# Altium PCB Design2.PcbDoc
Units mm, origin at the board's own origin, x right, y up, seen from the top; angles counter-clockwise.
Board outline 75 x 80 mm, 4 copper layers (Top Layer, Layer 1, Layer 2, Bottom Layer), stack 0.603 mm thick; 55 components, 25 nets, 149 pads, 260 vias.
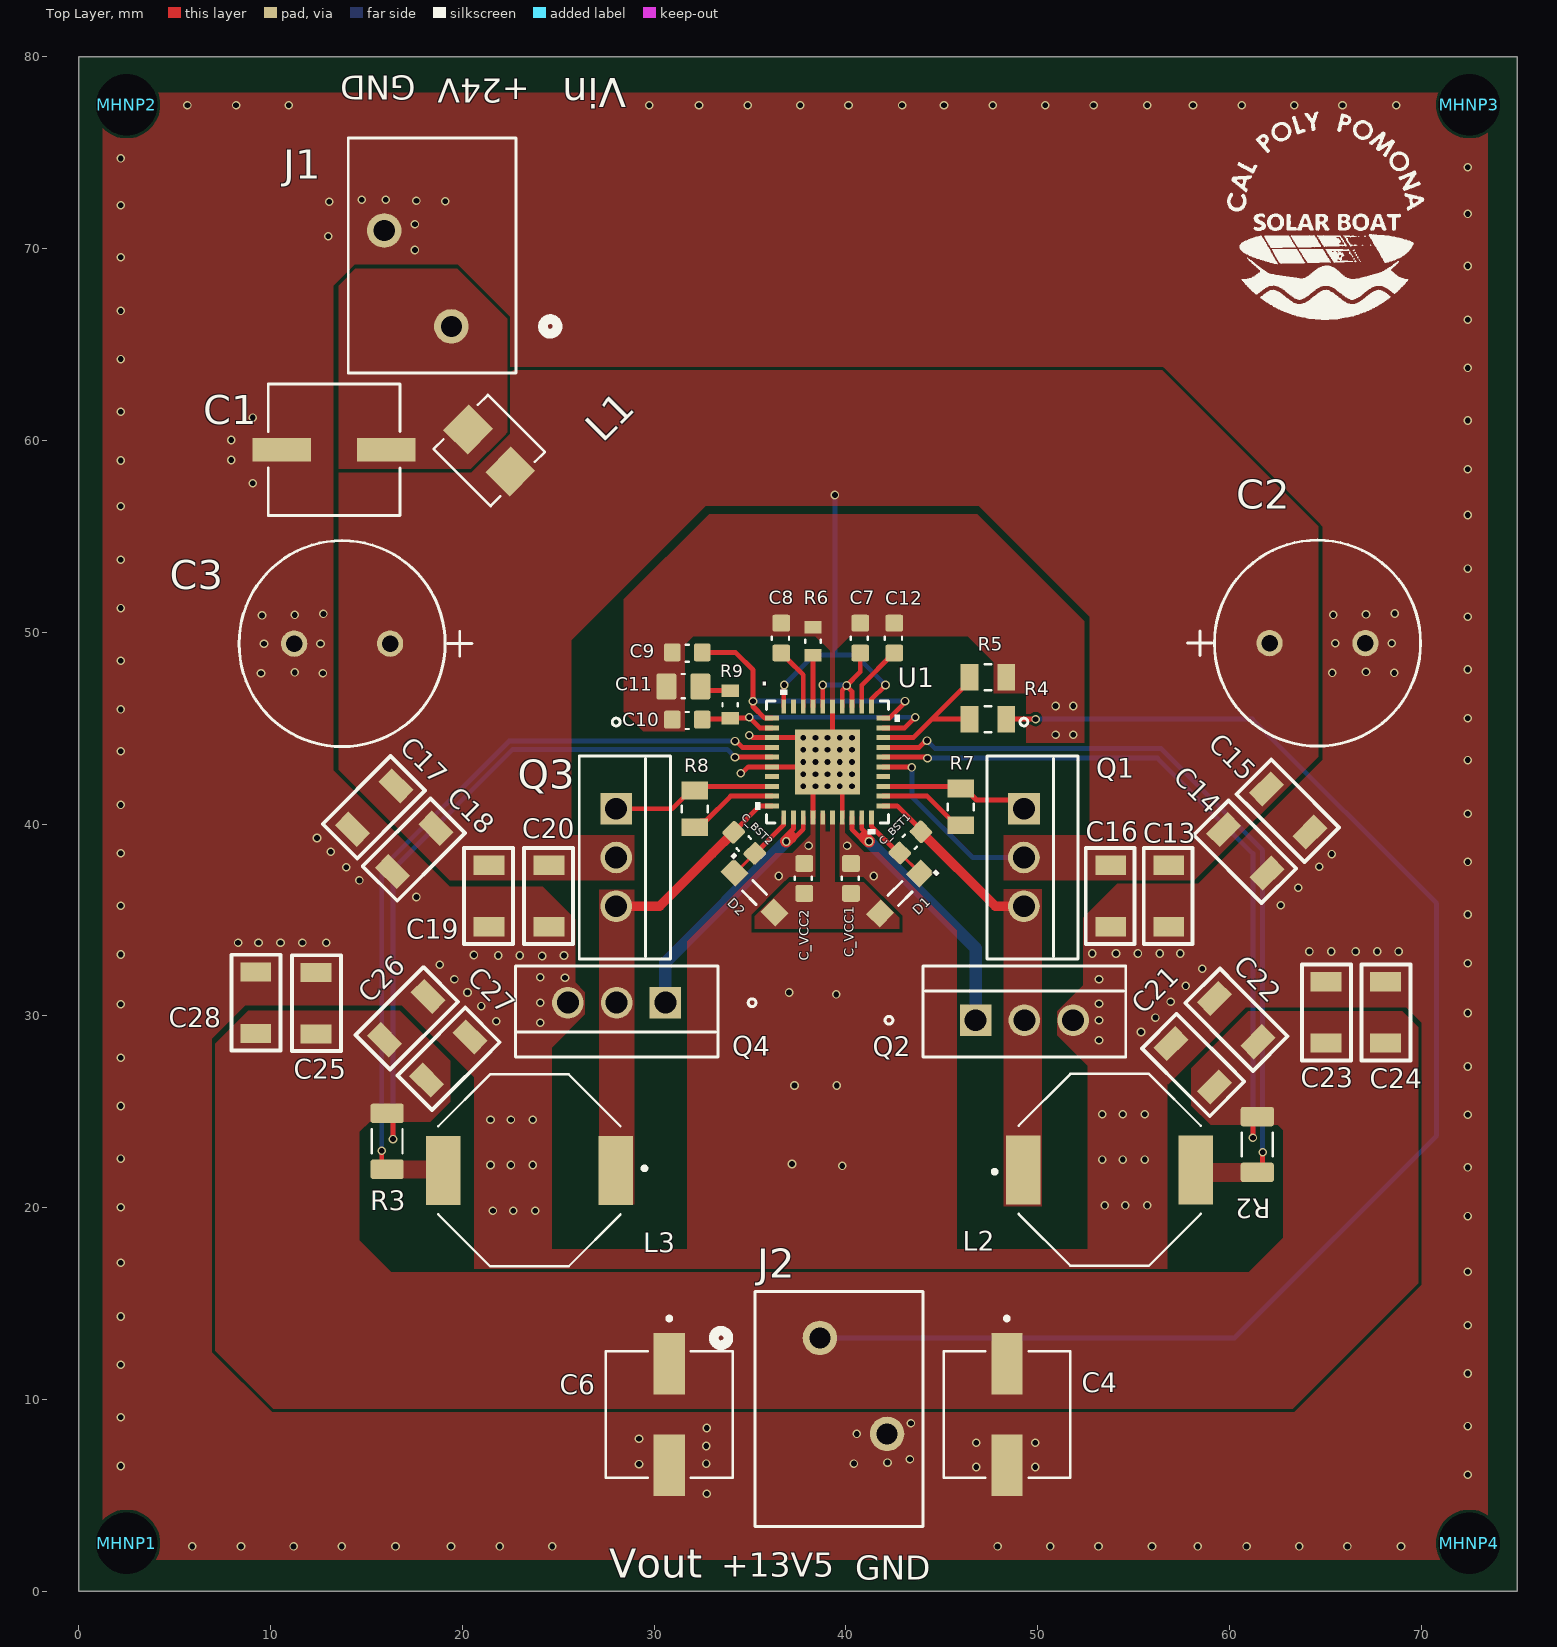
[diagram p0: Top Layer view]
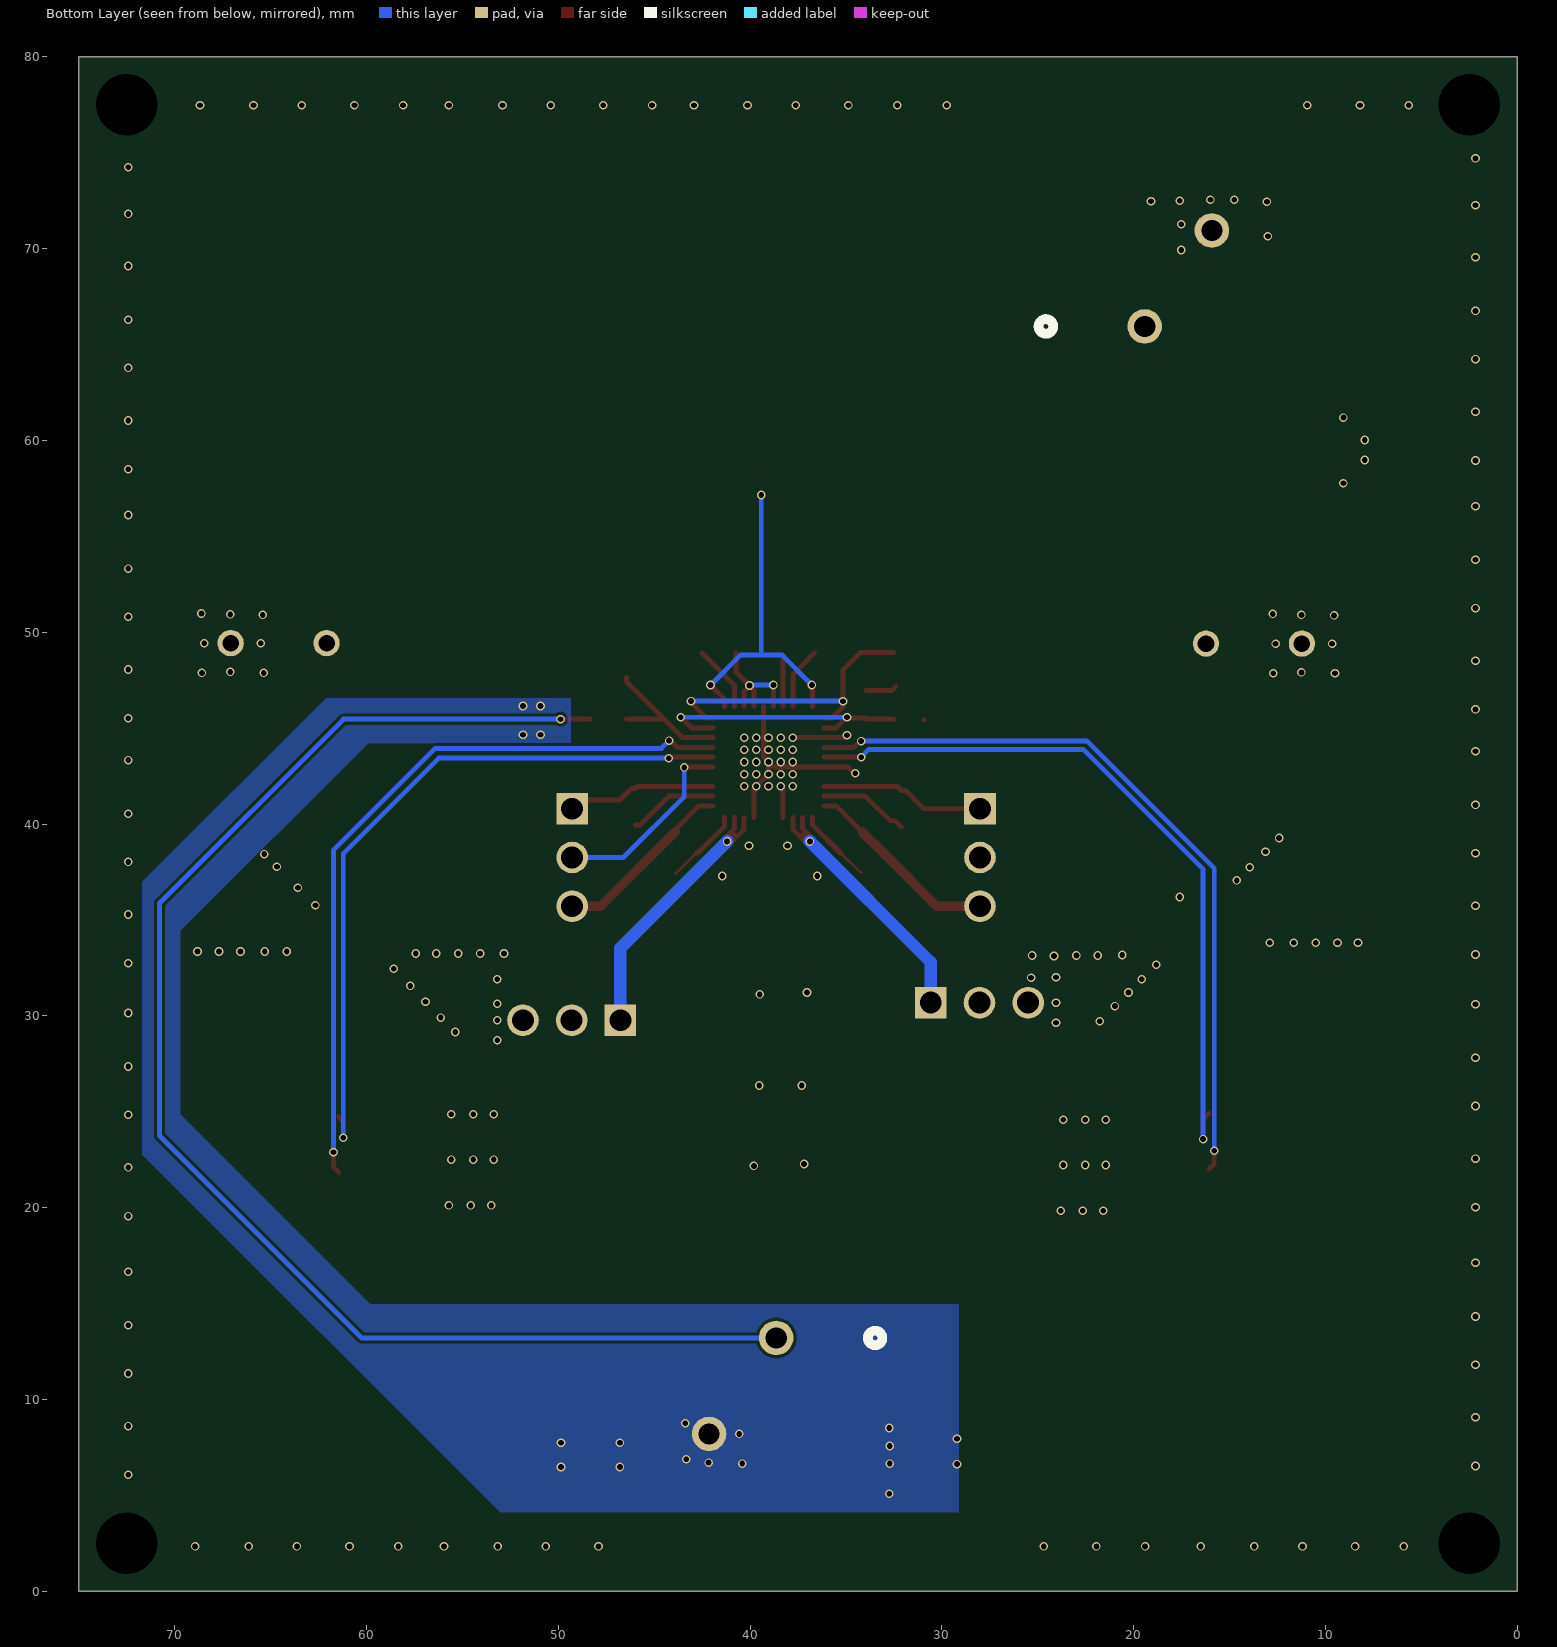
[diagram p1: Bottom Layer view, seen from below]
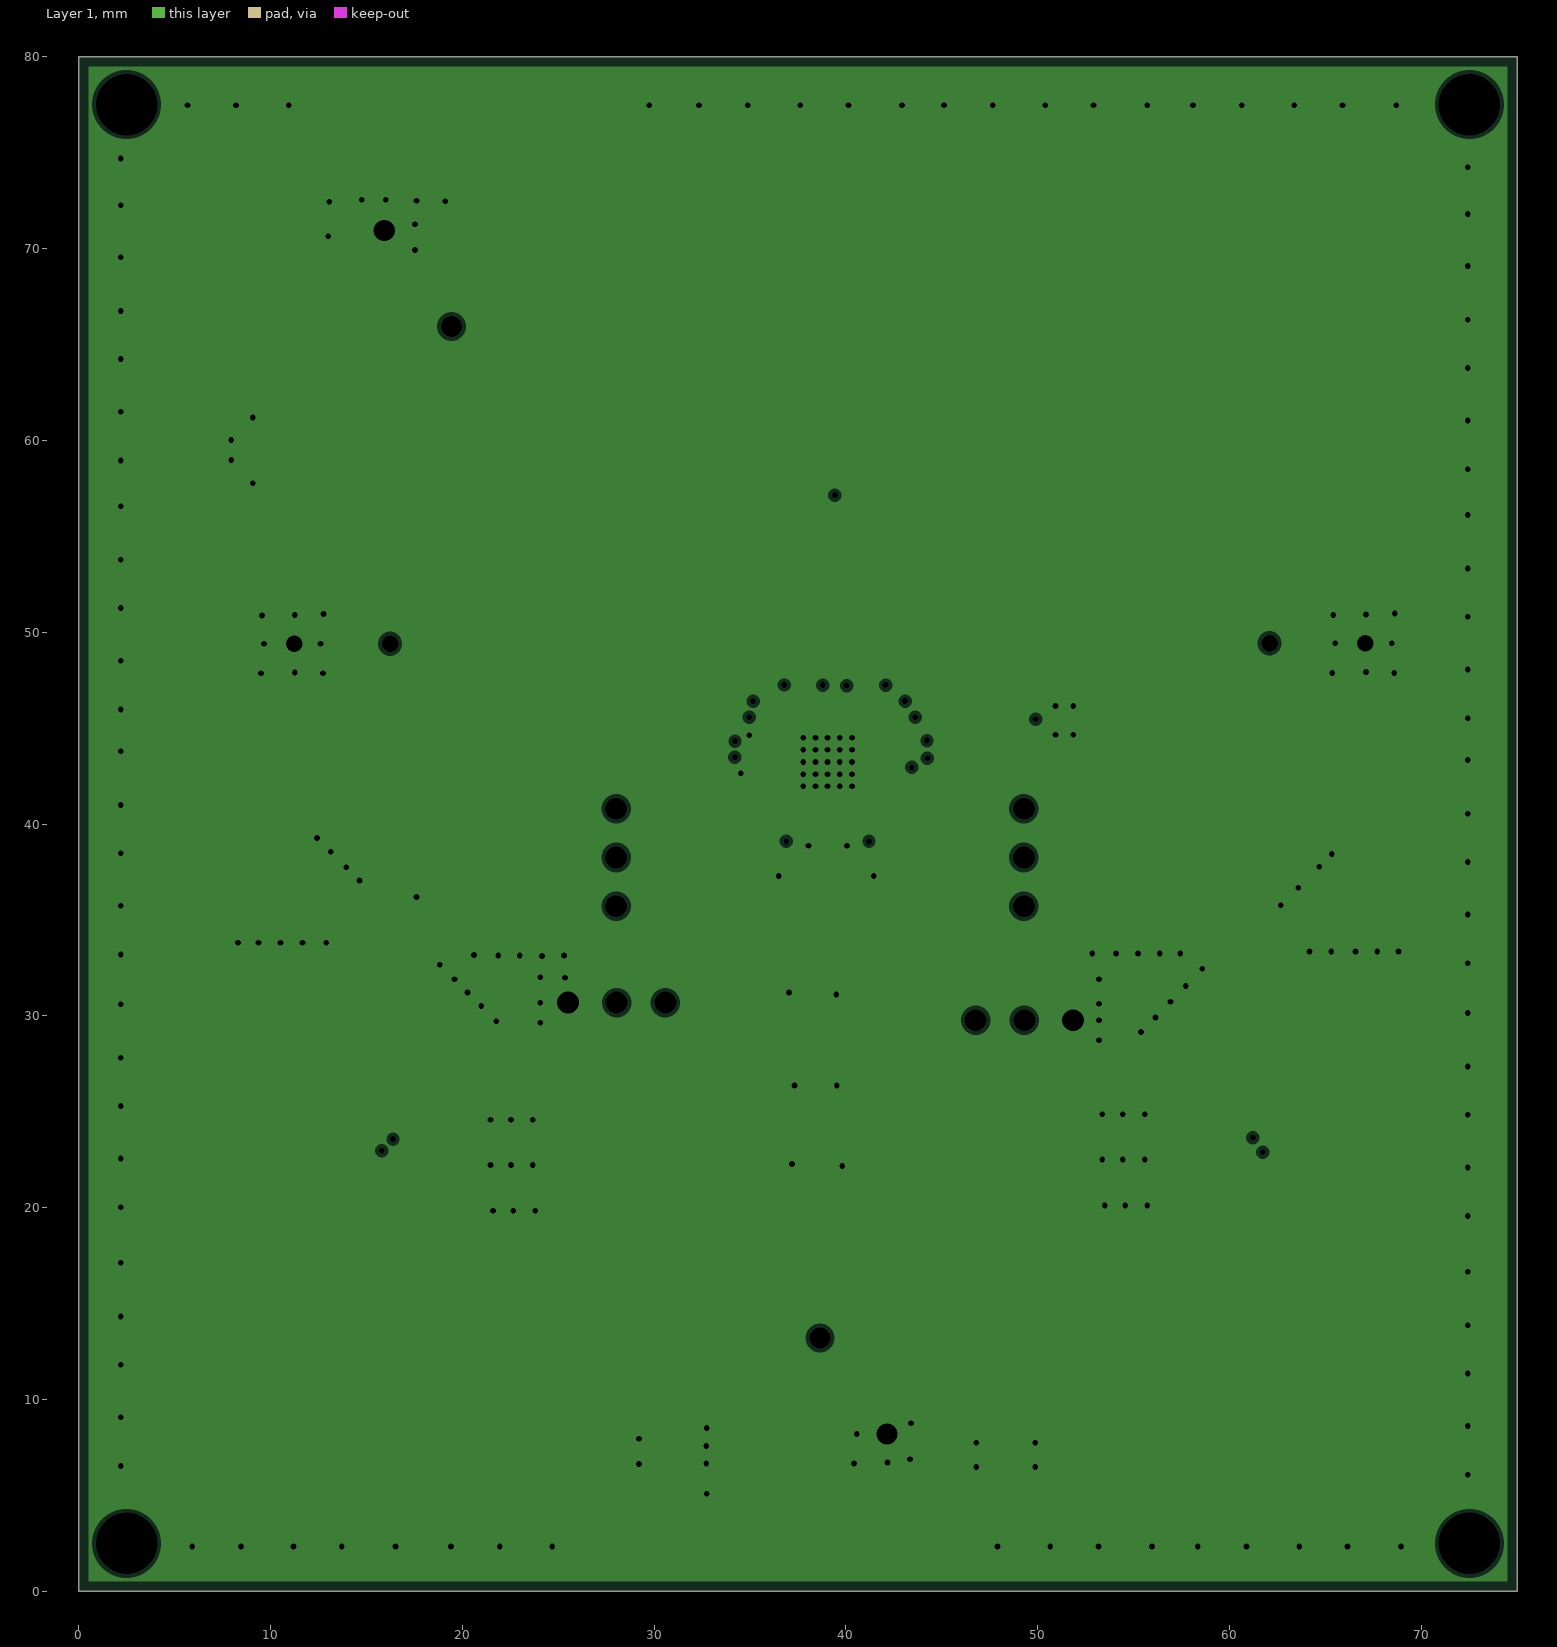
[diagram p2: Layer 1, clearances drawn from the general rule]
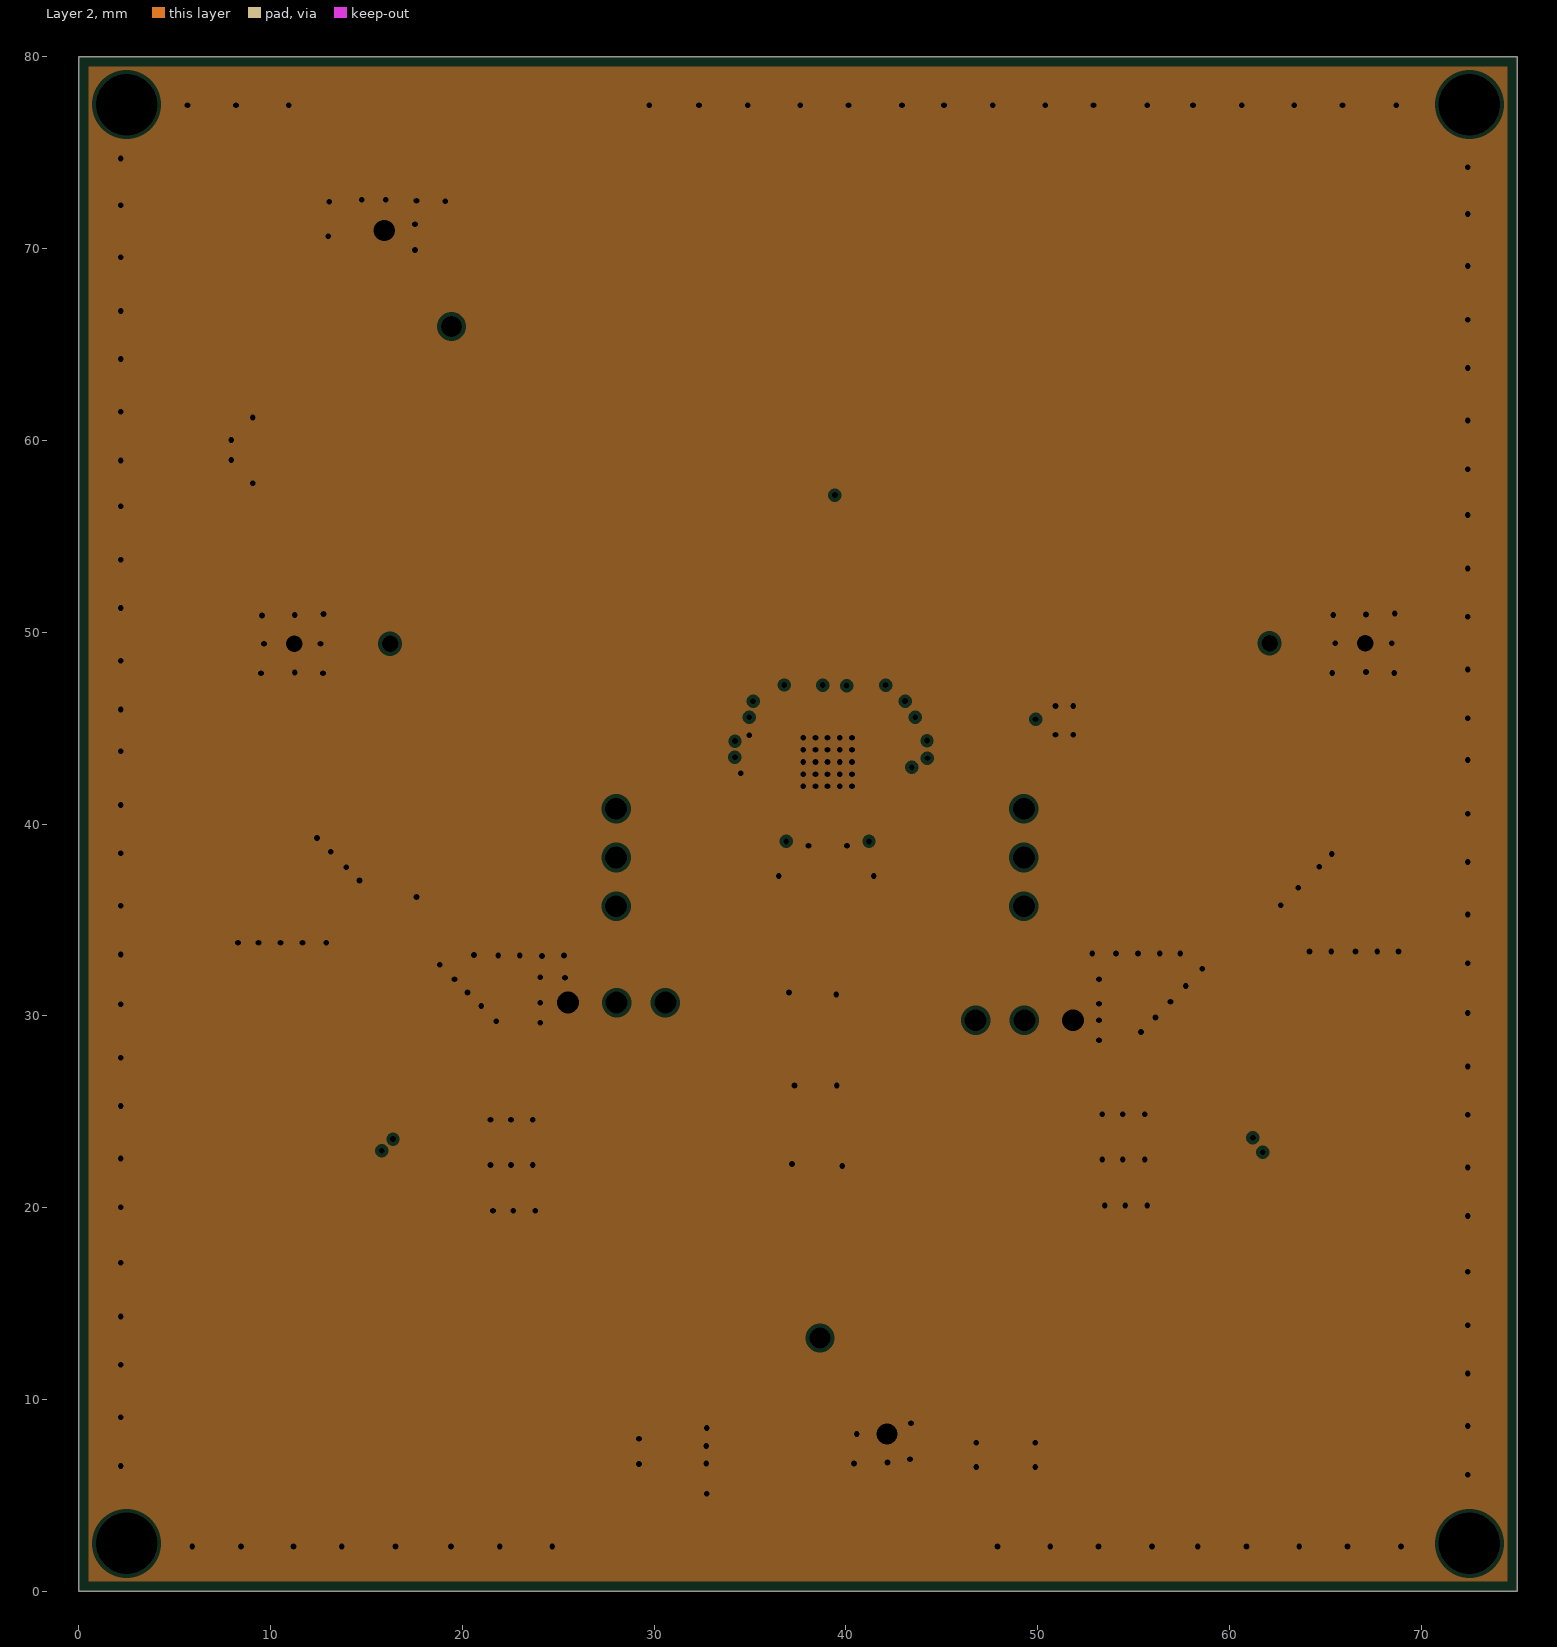
[diagram p3: Layer 2, clearances drawn from the general rule]
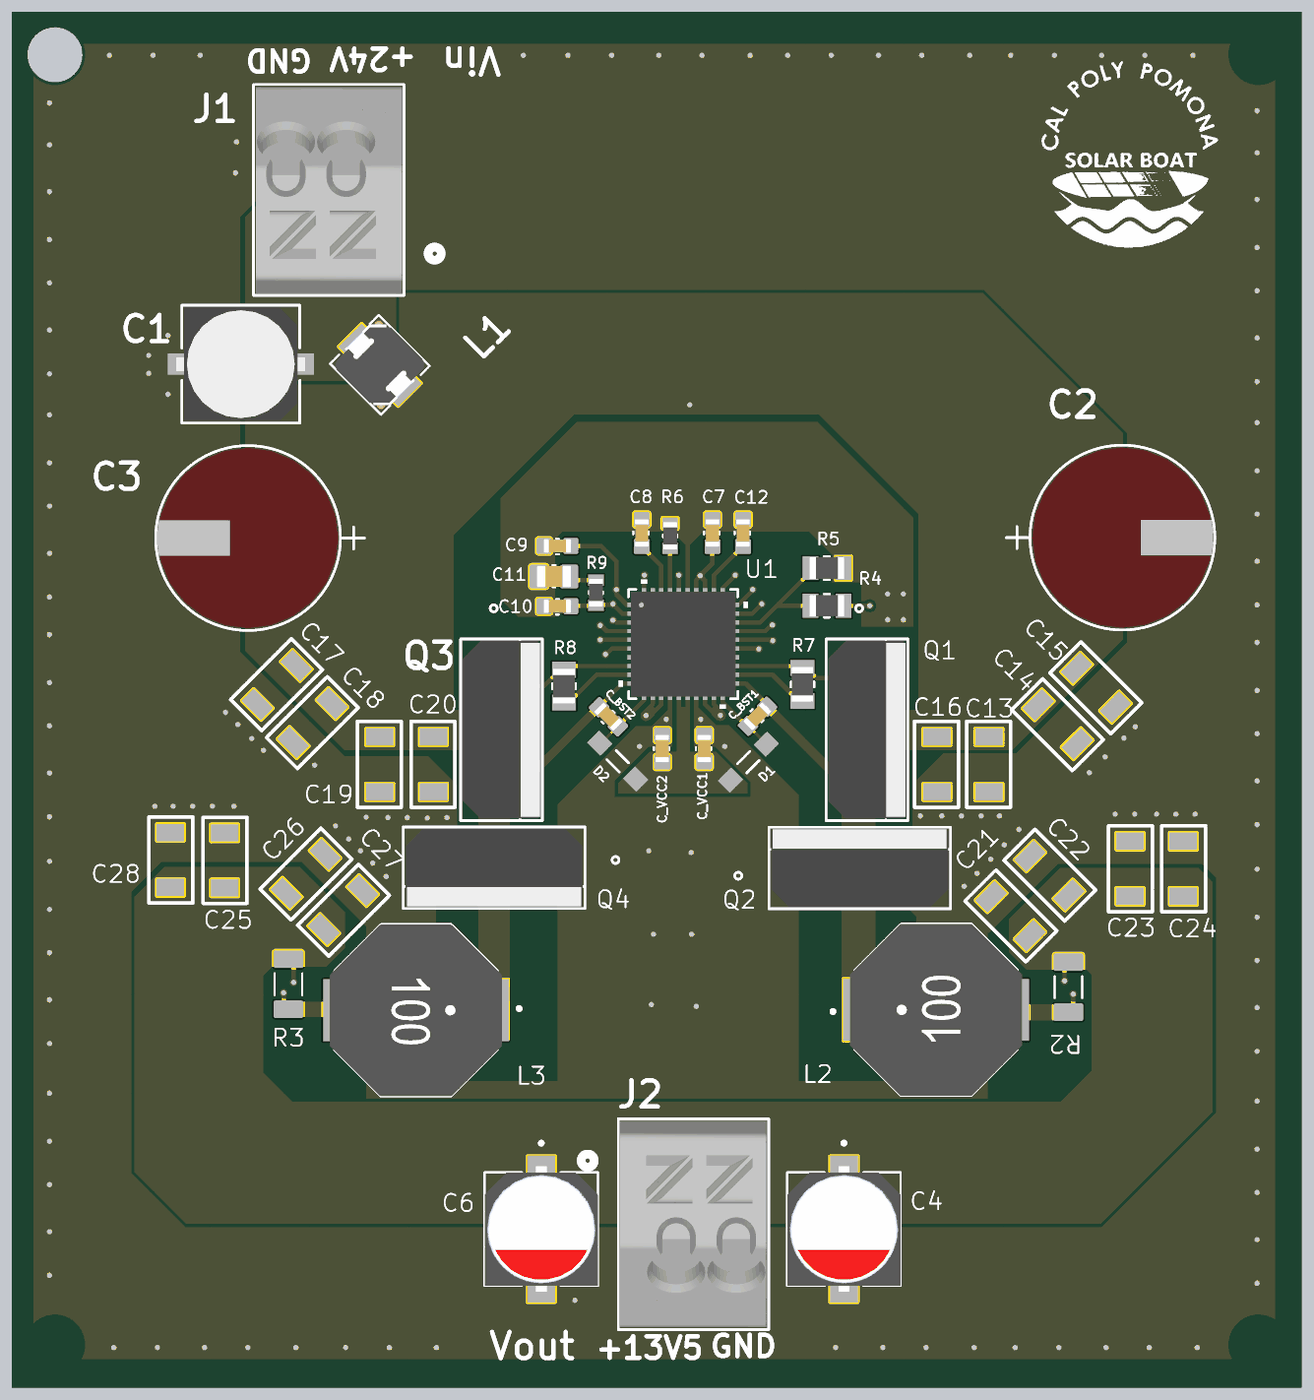
[diagram p4: 3D render of the assembled board from above, using the file's embedded part models]

## Layer stack, top to bottom
Top Solder: solder mask 0.0102, Solder Resist, Dk 3.5
Top Layer: signal copper 0.0356
Dielectric 2: prepreg 0.0711, PP-006, Dk 4.1
Layer 1: plane copper 0.035, net GND
Dielectric 1: dielectric 0.32, FR-4, Dk 4.8
Layer 2: plane copper 0.035, net GND
Dielectric 3: prepreg 0.0711, PP-006, Dk 4.1
Bottom Layer: signal copper 0.0356
Bottom Solder: solder mask 0.0102, Solder Resist, Dk 3.5

## Board outline
0,0 0,80 75,80 75,0

## Design rules (kind name [scope] priority, off if disabled: settings)
Clearance [All] p1: gap=0.152 ignorepadtopadclearanceinfootprint=FALSE
HoleSize [All] p1: absolutevalues=TRUE maxlimit=3.5 minlimit=0.3 maxpercent=80.000 minpercent=20.000
MinimumSolderMaskSliver [All] p1: minsoldermaskwidth=0
PlaneClearance [All] p1: clearance=0.2
PlaneConnect [All] p1: planeconnectstyle=Direct reliefexpansion=0.508 reliefentries=4 reliefconductorwidth=0.254 reliefairgap=0.254
PolygonConnect [All] p1: connectstyle=Direct reliefconductorwidth=0.254 reliefentries=4 polygonreliefangle="90 Angle" airgapwidth=0.254
RoutingVias [All] p1: holewidth=0.711 width=1.27 viastyle="Through Hole" minholewidth=0.3 minwidth=0.45 maxholewidth=0.711 maxwidth=1.27
SilkToSilkClearance [All] p1: silktosilkclearance=0
SilkToSolderMaskClearance [IsPad] p1: minsilkscreentomaskgap=0.102 clearancetoexposedcopper=TRUE
SolderMaskExpansion [All] p1: expansion=0.102 istentingtop=FALSE
SupplyNets "Schematic Supply Nets_9" [InNet('CS1')] p1: voltage=0.000
SupplyNets "Schematic Supply Nets_5" [InNet('13V')] p2: voltage=0.000
SupplyNets "Schematic Supply Nets_12" [InNet('CS2')] p3: voltage=0.000
SupplyNets "Schematic Supply Nets_13" [InNet('GL2')] p4: voltage=0.000
SupplyNets "Schematic Supply Nets_7" [InNet('GND')] p5: voltage=0.000
SupplyNets "Schematic Supply Nets_14" [InNet('SW1')] p6: voltage=0.000
SupplyNets "Schematic Supply Nets_11" [InNet('HB1')] p7: voltage=0.000
SupplyNets "Schematic Supply Nets_10" [InNet('GH1')] p8: voltage=0.000
SupplyNets "Schematic Supply Nets_8" [InNet('Vb')] p9: voltage=0.000
SupplyNets "Schematic Supply Nets_6" [InNet('SW2')] p10: voltage=0.000
SupplyNets "Schematic Supply Nets_4" [InNet('Vin')] p11: voltage=0.000
SupplyNets "Schematic Supply Nets_3" [InNet('GH2')] p12: voltage=0.000
SupplyNets "Schematic Supply Nets_2" [InNet('VCC')] p13: voltage=0.000
SupplyNets "Schematic Supply Nets_1" [InNet('GL1')] p14: voltage=0.000
SupplyNets "Schematic Supply Nets" [InNet('HB2')] p15: voltage=0.000
Width [All] p1: maxlimit=0.7 minlimit=0.152 preferedwidth=0.152
24 further rules are at their usual default settings.

## Classes and differential pairs
component class MainPDU_13VBuck: C1 C2 C4 C6 C7 C8 C9 C10 C11 C12 C13 C14 C15 C17 C18 C19 C21 C22 C23 C24 C25 C26 C27 C28 C_BST1 C_BST2 C_VCC1 C_VCC2 D1 D2 J1 J2 L1 L2 L3 MHNP1 MHNP2 MHNP3 MHNP4 Q1 Q2 Q3 Q4 R2 R3 R4 R5 R6 R7 R8 R9 U1

## Components (designator, comment, footprint, x,y, rotation, side; value= is the part's Value field where it differs from the comment)
C1 "10uF" CAP_GY_6P3X5P8_NCH 13.31,59.512 r180 top
C2 "100uF" CAP_YX_10X20_RUB 62.081,49.428 r0 top
C3 "100uF" CAP_YX_10X20_RUB 16.231,49.403 r180 top
C4 "100uF" CAPAE660X600N 48.387,9.22 r270 top
C6 "100uF" CAPAE660X600N 30.785,9.22 r270 top
C7 "470nF" CAPC1608X90N 40.742,49.695 r270 top
C8 "100nF" CAPC1608X90N 36.627,49.695 r270 top
C9 "100nF" CAPC1608X90N 31.725,48.946 r0 top
C10 "12pF" CAPC1608X90N 31.725,45.441 r0 top
C11 "220pF" CAPC2012X75N 31.521,47.168 r0 top
C12 "470nF" CAPC1608X90N 42.52,49.695 r270 top
C13 "10uF" "CAP 1206" 56.82,39.853 r270 top
C14 "10uF" "CAP 1206" 58.269,41.122 r315 top
C15 "10uF" "CAP 1206" 60.504,43.255 r315 top
C16 "10uF" "CAP 1206" 53.797,39.853 r270 top
C17 "10uF" "CAP 1206" 17.957,43.408 r225 top
C18 "10uF" "CAP 1206" 20.04,41.198 r225 top
C19 "10uF" "CAP 1206" 21.387,39.853 r270 top
C20 "10uF" "CAP 1206" 24.511,39.853 r270 top
C21 "47uF" "CAP 1206" 60.629,24.868 r135 top
C22 "47uF" "CAP 1206" 62.889,27.23 r135 top
C23 "47uF" "CAP 1206" 65.024,26.568 r90 top
C24 "47uF" "CAP 1206" 68.123,26.568 r90 top
C25 "47uF" "CAP 1206" 12.37,27.051 r90 top
C26 "47uF" "CAP 1206" 14.532,27.334 r45 top
C27 "47uF" "CAP 1206" 16.714,25.223 r45 top
C28 "47uF" "CAP 1206" 9.22,27.076 r90 top
C_BST1 "2.2uF" CAPC1608X90N 43.358,39.04 r225 top
C_BST2 "2.2uF" CAPC1608X90N 34.696,39.014 r315 top
C_VCC1 "2.2uF" CAPC1608X90N 40.259,37.16 r270 top
C_VCC2 "2.2uF" CAPC1608X90N 37.821,37.16 r270 top
D1 "60V 1A" DIO_RB051MM_ROM 42.824,36.373 r225 top
D2 "60V 1A" DIO_RB051MM_ROM 35.23,36.424 r315 top
J1 "250-202" CONN2_250-202_WAG 19.426,65.942 r180 top
J2 "250-202" CONN2_250-202_WAG 38.639,13.204 r0 top
L1 "1uH" IND_SPM4030T-1R0M 21.399,59.474 r315 top
L2 "2.2uH" IND_SRU1048-2R2Y 53.746,21.971 r0 top
L3 "2.2uH" IND_SRU1048-2R2Y 23.495,21.946 r180 top
MHNP1 "Mounting Hole Non-Plated 3.2 mm" MTHNP3P2MM#1 13.161,86.059 r90 top
MHNP2 "Mounting Hole Non-Plated 3.2 mm" MTHNP3P2MM#2 2.5,77.5 r90 top
MHNP3 "Mounting Hole Non-Plated 3.2 mm" MTHNP3P2MM#3 31.115,85.776 r90 top
MHNP4 "Mounting Hole Non-Plated 3.2 mm" MTHNP3P2MM#4 40.005,85.776 r90 top
Q1 "IRFZ44N,127" SOT78_TO220_NXP 49.276,40.793 r270 top
Q2 "IRFZ44N,127" SOT78_TO220_NXP 46.761,29.769 r0 top
Q3 "IRFZ44N,127" SOT78_TO220_NXP 28.016,40.793 r270 top
Q4 "IRFZ44N,127" SOT78_TO220_NXP 30.582,30.683 r180 top
R2 "Res 4m" "RES 1206" 61.443,23.292 r90 top
R3 "Res 4m" "RES 1206" 16.078,23.459 r270 top
R4 "430k" RES0805 47.396,45.466 r180 top
R5 "20k" RES0805 47.396,47.65 r0 top
R6 "54.9k" RES_ERJ3EKF5492V 38.278,49.53 r90 top
R7 "3.3" RES0805 45.974,40.894 r90 top
R8 "3.3" RES0805 32.106,40.792 r90 top
R9 "54.9k" RES_ERJ3EKF5492V 33.96,46.228 r90 top
U1 "LM5143RHAR" VQFN40_RHA_TEX-L 39.04,43.232 r0 top

## Footprints (in the part's own frame and the unit in brackets; to place one, negate y for a bottom-side part, rotate by r counter-clockwise, add the part's x,y. Pads: shape width x height; smd on the part's side, far side on the other; paste and mask are expansions set on the pad)
"CAP 1206" [mm] "Generic SMD capacitor with 1206 package (3216 metric)"
  rect 1x1.6 smd: 1(2.007,0) 2(5.207,0)
  silkscreen extent 1.11,-1.3 6.11,1.25
CAP_GY_6P3X5P8_NCH [mil]
  rect 120x48 smd paste+0 mask+0: 1(-107.5,0) 2(107.5,0)
  silkscreen extent -135,-135 135,135, body extent -147,-130 147,130, height 250
CAP_YX_10X20_RUB [mil]
  round 54 / inner round 60 / far side round 54 hole 34 paste-99999 mask+0: 1(0,0) 2(196.85,0)
  silkscreen extent -168,-212 310,212, body extent -108,-206 306,206, height 867
CAPAE660X600N [mm]
  rect 3.21x1.62 smd paste+0 mask+0.102: 1(-2.65,0) 2(2.65,0)
  silkscreen extent -5.1,-3.3 3.3,3.3, body extent -3.65,-3.3 3.65,3.3, height 6
CAPC1608X90N [mm]
  rrect25% 0.87x0.93 smd paste+0 mask+0.102: 1(-0.78,0) 2(0.78,0)
  silkscreen extent -0.08,-0.49 0.08,0.4, body extent -0.8,-0.4 0.8,0.4, height 0.9
CAPC2012X75N [mm]
  rrect25% 1.05x1.38 smd paste+0 mask+0.102: 1(-0.888,0) 2(0.888,0)
  silkscreen extent -0.08,-0.62 0.08,0.65, body extent -1,-0.63 1,0.63, height 0.75
CONN2_250-202_WAG [mm]
  round 1.8 / inner round 1.524 / far side round 1.8 hole 1.1 paste-2539.97 mask+0: 1(0,0) 2(3.5,-5)
  silkscreen extent -5.54,-9.83 5.38,2.43, body extent -3.26,-9.69 5.24,2.31, height 12.81
DIO_RB051MM_ROM [mil]
  rect 43x39 smd paste+0 mask+0: 1(-58,0) 2(58,0)
  silkscreen extent -20,-15 20,15
IND_SPM4030T-1R0M [mm]
  rect 1.8x1.9 smd: 1(-1.55,0) 2(1.55,0)
  silkscreen extent -2.1,-2 2.1,2, body extent -2.1,-2 2.1,2, height 2.86
IND_SRU1048-2R2Y [mm]
  rect 1.8x3.6 smd: 1(-4.5,0) 2(4.5,0)
  silkscreen extent -6.1,-5 4.75,5, body extent -5,-5 5,5, height 5.1
MTHNP3P2MM#1 [mm] "Mounting Hole Non Plated 3.2 mm hole"
  round 1 hole 3.2 unplated: ""(-83.559,10.661)
MTHNP3P2MM#2 [mm] "Mounting Hole Non Plated 3.2 mm hole"
  round 1 hole 3.2 unplated: ""(0,0)
MTHNP3P2MM#3 [mm] "Mounting Hole Non Plated 3.2 mm hole"
  round 1 hole 3.2 unplated: ""(-8.276,-41.385)
MTHNP3P2MM#4 [mm] "Mounting Hole Non Plated 3.2 mm hole"
  round 1 hole 3.2 unplated: ""(-83.276,-32.495)
RES0805 [mm] "Generic 0805 Res;"
  rect 0.92x1.38 smd paste+0 mask+0.102: 1(-0.955,0) 2(0.955,0)
  silkscreen extent -0.17,-0.68 0.17,0.68, body extent -1,-0.63 1,0.63, height 0.6
"RES 1206" [mm]
  rrect25% 1.02x1.73 smd: 1(-1.455,0) 2(1.455,0)
  silkscreen extent -0.63,-0.8 0.63,0.8
RES_ERJ3EKF5492V [mm]
  rect 0.65x0.9 smd paste+0 mask+0.102: 1(-0.725,0) 2(0.725,0)
  silkscreen extent -0.08,-0.4 0.08,0.4, body extent -0.8,-0.4 0.8,0.4, height 0.45
SOT78_TO220_NXP [mil]
  rect 65x65 hole 45 paste-99999 mask+0: 1(0,0)
  round 65 hole 45 paste-99999 mask+0: 2(100,0) 3(200,0)
  silkscreen extent -186,-76 308,111, body extent -103,-71 303,106, height 740
VQFN40_RHA_TEX-L [mil]
  rect 28x10 smd paste+0 mask+0: 1(-114,90) 2(-114,70) 3(-114,50) 4(-114,30) 5(-114,10) 6(-114,-10) 7(-114,-30) 8(-114,-50) 9(-114,-70) 10(-114,-90) 21(114,-90) 22(114,-70) 23(114,-50) 24(114,-30) 25(114,-10) 26(114,10) 27(114,30) 28(114,50) 29(114,70) 30(114,90)
  rect 10x28 smd paste+0 mask+0: 11(-90,-114) 12(-70,-114) 13(-50,-114) 14(-30,-114) 15(-10,-114) 16(10,-114) 17(30,-114) 18(50,-114) 19(70,-114) 20(90,-114) 31(90,114) 32(70,114) 33(50,114) 34(30,114) 35(10,114) 36(-10,114) 37(-30,114) 38(-50,114) 39(-70,114) 40(-90,114)
  rect 134x134 smd paste-67 mask+0: 41(0,0)
  silkscreen extent -148,-148 148,148, body extent -120,-120 120,120, height 39

## Part data
C1: library part GYA1J100MCQ1GS, "Description", Manufacturer_Name=Nichicon, Copyright="Copyright (C) 2026 Ultra Librarian. All rights reserved.", Manufacturer_Part_Number=GYA1J100MCQ1GS
C2 C3: library part 100ZLH100MEFC10X20, "Description", Manufacturer_Name=Rubycon, Copyright="Copyright (C) 2025 Ultra Librarian. All rights reserved.", Manufacturer_Part_Number=100ZLH100MEFC10X20
C4 C6: library part A768EB107M1ELAS036, "100 ÂµF 25 V Aluminum - Polymer Capacitors Radial, Can - SMD 36mOhm 2000 Hrs @ 125Â°C", Package=None, Check_prices=https://www.snapeda.com/parts/A768EB107M1ELAS036/Kemet/view-part/?ref=eda, MF=KEMET, MP=A768EB107M1ELAS036, SnapEDA_Link=https://www.snapeda.com/parts/A768EB107M1ELAS036/Kemet/view-part/?ref=snap
C7 C8 C9 C10 C12 C_BST1 C_BST2 C_VCC1 C_VCC2: library part CL10B474KA8NFNC, "0.47 ÂµF Â±10% 25V Ceramic Capacitor X7R 0603 (1608 Metric)", Package="SMD-2 Samsung", Check_prices=https://www.snapeda.com/parts/CL10B474KA8NFNC/Samsung/view-part/?ref=eda, MF="Samsung Electro-Mechanics", MP=CL10B474KA8NFNC, SnapEDA_Link=https://www.snapeda.com/parts/CL10B474KA8NFNC/Samsung/view-part/?ref=snap
C11: library part CL21C221JBANNNC, "0805 (2012 Metric) 220 pF Â±5% 50V Ceramic Capacitor C0G, NP0", Package="SMD-2 Samsung", Check_prices=https://www.snapeda.com/parts/CL21C221JBANNNC/Samsung/view-part/?ref=eda, MF=Samsung, MP=CL21C221JBANNNC, SnapEDA_Link=https://www.snapeda.com/parts/CL21C221JBANNNC/Samsung/view-part/?ref=snap
C13 C14 C15 C16 C17 C18 C19 C20 C21 C22 C23 C24 C25 C26 C27 C28: library part "Cap 1206", "Generic SMD capacitor with 1206 package (3216 metric)"
D1 D2: library part RBR1MM60ATR, "DIODE SCHOTTKY 60V 1A PMDU", Package="TO-263-3 Infineon Technologies", Availability="In Stock", Check_prices=https://www.snapeda.com/parts/IDK05G120C5XTMA1/Infineon%20Technologies/view-part/4703675/?ref=eda, MF="Infineon Technologies", MP=IDK05G120C5XTMA1, Price=None, SnapEDA_Link=https://www.snapeda.com/parts/IDK05G120C5XTMA1/Infineon%20Technologies/view-part/4703675/?ref=snap
J1 J2: "Description", Manufacturer_Name=Wago, Copyright="Copyright (C) 2025 Ultra Librarian. All rights reserved.", Manufacturer_Part_Number=250-202, RefDes=RefDes, Type=Type
L1: library part SPM4030T-1R0M, Package=None, Availability=Unavailable, MF="{'manufacturer': u'TDK Corporation'}", MP=SPM4030T-1R0M, Price=None
L2 L3: library part SRU1048-2R2Y, "Ind10x10x4.8mm,2.2uH30%6.5A,shdSMD", Package="Non Standard Bourns", Check_prices=https://www.snapeda.com/parts/SRU1048-2R2Y/Bourns/view-part/?ref=eda, MF=Bourns, MP=SRU1048-2R2Y, SnapEDA_Link=https://www.snapeda.com/parts/SRU1048-2R2Y/Bourns/view-part/?ref=snap
MHNP1 MHNP2 MHNP3 MHNP4: library part MTHNP3P2MM
Q1 Q2 Q3 Q4: "Power Switching Mosfet", Manufacturer_Name=NXP, Copyright="Copyright (C) 2025 Ultra Librarian. All rights reserved.", Manufacturer_Part_Number=IRFZ44N,127, RefDes=RefDes, Type=Type
R2 R3: library part "Res 1206", "Generic SMD resistor with 1206 package (3216 metric)"
R4 R5 R7 R8: library part RC0805FR-07430KL, "Generic 0805 Res; Original: 430 kOhms Â±1% 0.125W, 1/8W Chip Resistor 0805 (2012 Metric) Moisture Resistant Thick Film RC0805FR-07430KL", Package="2012 Yageo", Check_prices=https://www.snapeda.com/parts/RC0805FR-07430KL/Yageo/view-part/?ref=eda, MF=Yageo, MP=RC0805FR-07430KL, SnapEDA_Link=https://www.snapeda.com/parts/RC0805FR-07430KL/Yageo/view-part/?ref=snap
R6 R9: library part ERJ3EKF5492V, "Res Thick Film 0603 54.9K Ohm 1% 1/10W Â±100ppm/Â°C Molded SMD SMD Punched Carrier T/R", Package="1608-2 Panasonic", Check_prices=https://www.snapeda.com/parts/ERJ3EKF5492V/Panasonic/view-part/?ref=eda, MF=Panasonic, MP=ERJ3EKF5492V, SnapEDA_Link=https://www.snapeda.com/parts/ERJ3EKF5492V/Panasonic/view-part/?ref=snap
U1: library part LM5143RHAR_1, "3.5-V to 65-V, dual-output, stackable, synchronous buck DC/DC controller with ultra-low IQ 40-VQFN -40 to 150", Manufacturer_Name="Texas Instruments", Copyright="Copyright (C) 2026 Ultra Librarian. All rights reserved.", Manufacturer_Part_Number=LM5143RHAR, RefDes=RefDes, Type=Type

## Via types
v1: diameter 0.45, hole 0.3, Top Layer to Bottom Layer, tented top, 235 vias
v2: diameter 0.45, hole 0.3, Top Layer to Bottom Layer, tented bottom, 25 vias

## Nets (pads, with @x,y where several pads share a name; then routed paths per layer and width w, separated by ;. In a path a pad name is that pad's centre, name@x,y a point inside that pad or via, vN(x,y) a via of type N, cw(c..) or ccw(c..) an arc to the next point about the centre after c; other vN are vias at no path point)
13V: C4.1 C6.1 C21.1 C22.1 C23.1 C24.1 C25.1 C26.1 C27.1 C28.1 J2.1 R2.2 R3.1 R4.1 U1.5 U1.26 | length 150.5
  Top Layer w0.254: R3.1 16.383,24.609 v1(16.383,23.571) ; v1(34.211,43.485) v1(34.211,43.485) U1.5 ; U1.26 44.128,43.486 44.18,43.434 v1(44.247,43.434) ; R4.1 v1(49.886,45.466) ; v1(61.214,23.647) 61.214,24.518 R2.2
  Bottom Layer w0.254: v1(16.383,23.571) 16.383,37.643 22.631,43.891 33.804,43.891 v1(34.211,43.485) ; J2.1 60.245,13.204 70.79,23.749 70.79,35.865 61.189,45.466 v1(49.886,45.466) ; v1(44.247,43.434) 56.233,43.433 61.214,38.452 v1(61.214,23.647)
CS1: L2.2 R2.1 U1.27 | length 39.2
  Top Layer w0.254: U1.27 43.813,43.994 44.168,44.349 v1(44.221,44.349) ; R2.1 61.722,22.116 v1(61.722,22.885)
  Bottom Layer w0.254: v1(44.221,44.349) 44.628,43.943 56.413,43.943 61.722,38.634 v1(61.722,22.885)
CS2: L3.2 R3.2 U1.4 | length 39
  Top Layer w0.254: v1(15.799,22.962) 15.799,22.283 R3.2 ; v1(34.214,44.323) 34.267,44.323 34.596,43.994 U1.4
  Bottom Layer w0.254: v1(15.799,22.962) 15.799,37.694 22.428,44.323 v1(34.214,44.323)
GH1: Q1.1 R7.2 U1.23 | length 7.8
  Top Layer w0.254: U1.23 45.861,41.962 R7.2 46.204,41.849 46.802,41.251 48.819,41.251 Q1.1
GH2: Q3.1 R8.2 U1.8 | length 8.6
  Top Layer w0.254: Q3.1 30.939,40.793 31.543,41.397 31.543,41.414 31.876,41.747 R8.2 32.32,41.962 U1.8
GL1: Q2.1 U1.18 U1.19 | length 14.8
  Top Layer w0.254: U1.18 40.31,39.726 40.907,39.128 ; U1.19 40.818,39.751 41.161,39.408 41.161,39.128 v1(41.199,39.091)
  Top Layer w0.65: 40.97,39.319 v1(41.199,39.091)
  Bottom Layer w0.65: v1(41.199,39.091) 46.761,33.528 Q2.1
GL2: Q4.1 U1.12 U1.13 | length 14.2
  Top Layer w0.254: v1(36.881,39.091) 36.918,39.128 36.918,39.408 37.262,39.751 U1.12 ; 37.172,39.128 37.77,39.726 U1.13
  Top Layer w0.65: v1(36.881,39.091) 37.109,39.319
  Bottom Layer w0.65: Q4.1 30.582,32.791 v1(36.881,39.091)
GND: C1.2 C2.2 C3.2 C4.2 C6.2 C7.1 C8.1 C9.1 C10.1 C11.1 C12.1 C13.2 C14.2 C15.2 C16.2 C17.2 C18.2 C19.2 C20.2 C21.2 C22.2 C23.2 C24.2 C25.2 C26.2 C27.2 C28.2 C_VCC1.1 C_VCC2.1 J1.2 J2.2 Q2.3 Q4.3 R5.2 R6.2 U1.3 U1.6 U1.14 U1.17 U1.35 U1.41 | length 15.6
  Top Layer w0.254: C10.1@30.945,45.411 C10.1 ; v1(34.519,42.647) 34.572,42.647 34.903,42.978 U1.6 38.786,42.978 v2(39.04,43.232) ; v1(34.95,44.628) 35.003,44.628 35.129,44.502 U1.3 v2(37.77,44.502) ; U1.14 38.278,41.835 v2(38.405,41.962) ; U1.35 39.294,43.486 v2(39.04,43.232) ; U1.17 39.802,41.835 v2(39.675,41.962) v2(39.04,42.597) v2(39.04,43.232)
  other v1: 5.918,2.337 8.458,2.337 11.201,2.337 13.716,2.337 16.51,2.337 19.406,2.337 21.946,2.337 24.689,2.337 47.904,2.337 50.648,2.337 53.162,2.337 55.956,2.337 58.344,2.337 60.884,2.337 63.627,2.337 66.142,2.337 68.936,2.337 32.741,5.08 72.415,6.071 46.787,6.477 49.86,6.477 2.184,6.528 29.21,6.629 32.715,6.655 40.411,6.655 42.164,6.706 43.332,6.883 32.715,7.569 46.787,7.747 49.86,7.747 29.21,7.95 40.564,8.204 32.741,8.509 72.415,8.611 43.383,8.763 2.184,9.068 72.415,11.354 2.184,11.811 72.415,13.868 2.184,14.326 72.415,16.662 2.184,17.12 72.415,19.558 21.59,19.837 22.657,19.837 23.8,19.837 2.184,20.015 53.492,20.117 54.559,20.117 55.702,20.117 72.415,22.098 39.802,22.174 21.463,22.225 22.53,22.225 23.673,22.225 37.186,22.276 53.365,22.504 54.432,22.504 55.575,22.504 2.184,22.555 21.463,24.587 22.53,24.587 23.673,24.587 72.415,24.841 53.365,24.867 54.432,24.867 55.575,24.867 2.184,25.298 37.313,26.365 39.522,26.365 72.415,27.356 2.184,27.813 53.188,28.727 55.377,29.153 24.054,29.642 21.768,29.718 53.188,29.769 56.131,29.908 72.415,30.15 20.98,30.505 2.184,30.607 53.188,30.632 24.054,30.683 56.921,30.734 39.497,31.115 20.269,31.217 37.033,31.217 57.712,31.56 19.583,31.902 53.188,31.902 25.349,31.979 24.054,32.004 58.574,32.458 18.821,32.664 72.415,32.741 24.155,33.122 21.869,33.147 22.987,33.147 25.298,33.147 20.599,33.172 2.184,33.198 52.832,33.249 54.077,33.249 55.22,33.249 56.363,33.249 57.429,33.249 64.16,33.35 65.303,33.35 66.569,33.35 67.691,33.35 68.809,33.35 8.306,33.807 9.373,33.807 10.516,33.807 11.659,33.807 12.903,33.807 72.415,35.281 2.184,35.738 62.662,35.763 17.602,36.195 63.576,36.678 14.63,37.059 36.5,37.287 41.453,37.287 13.945,37.744 64.668,37.77 72.415,38.024 65.329,38.43 2.184,38.481 13.132,38.557 38.049,38.862 40.056,38.862 12.421,39.268 72.415,40.538 2.184,40.996 72.415,43.332 2.184,43.79 50.927,44.653 51.841,44.653 72.415,45.517 2.184,45.974 50.927,46.152 51.841,46.152 9.503,47.854 12.729,47.854 65.354,47.879 68.58,47.879 11.256,47.904 67.107,47.93 72.415,48.057 2.184,48.514 9.656,49.403 12.602,49.403 65.507,49.428 68.453,49.428 72.415,50.8 9.554,50.876 11.256,50.902 65.405,50.902 67.107,50.927 12.755,50.952 68.605,50.978 2.184,51.257 72.415,53.315 2.184,53.772 72.415,56.109 2.184,56.566 9.068,57.76 72.415,58.496 2.184,58.953 7.95,58.979 7.95,60.02 72.415,61.036 9.068,61.189 2.184,61.493 72.415,63.779 2.184,64.237 72.415,66.294 2.184,66.751 72.415,69.088 2.184,69.545 17.526,69.926 13.005,70.637 17.526,71.272 72.415,71.806 2.184,72.263 13.056,72.441 19.101,72.466 17.602,72.492 14.757,72.542 16.002,72.542 72.415,74.244 2.184,74.701 5.664,77.47 8.204,77.47 10.947,77.47 29.743,77.47 32.334,77.47 34.874,77.47 37.617,77.47 40.132,77.47 42.926,77.47 45.11,77.47 47.65,77.47 50.394,77.47 52.908,77.47 55.702,77.47 58.09,77.47 60.63,77.47 63.373,77.47 65.888,77.47 68.682,77.47
  other v2: 37.77,41.962 39.04,41.962 40.31,41.962 37.77,42.597 38.405,42.597 39.675,42.597 40.31,42.597 37.77,43.232 38.405,43.232 39.675,43.232 40.31,43.232 37.77,43.867 38.405,43.867 39.04,43.867 39.675,43.867 40.31,43.867 38.405,44.502 39.04,44.502 39.675,44.502 40.31,44.502
HB1: C_BST1.2 D1.1 U1.20 | length 4
  Top Layer w0.152: C_BST1.2 43.866,37.428 D1.1
  Top Layer w0.254: U1.20 41.326,39.884 42.721,38.488 C_BST1.2
HB2: C_BST2.2 D2.1 U1.11 | length 4
  Top Layer w0.152: D2.1 34.25,37.465 C_BST2.2
  Top Layer w0.254: C_BST2.2 35.26,38.463 36.754,39.957 U1.11
NetC7_2: C7.2 U1.33 U1.34 U1.36 | length 6.7
  Top Layer w0.254: U1.36 v1(38.786,47.244) ; U1.34 39.802,46.972 v1@40.03,47.2 ; U1.33 40.31,46.921 v1@40.03,47.2 ; C7.2 40.742,47.93 v1(40.03,47.219) v1@40.03,47.2
  Bottom Layer w0.254: v1(38.786,47.244) 40.005,47.244 v1(40.03,47.219)
NetC8_2: C8.2 U1.38 | length 3.3
  Top Layer w0.254: C8.2 36.657,48.915 36.965,48.607 36.965,48.577 37.77,47.772 U1.38
NetC9_2: C9.2 U1.1 U1.30 | length 15.6
  Top Layer w0.254: C9.2@32.515,48.935 34.25,48.935 35.154,48.031 v1(35.154,46.406) 35.154,46.126 35.762,45.518 U1.1 ; U1.30 42.265,45.518 43.041,46.294 43.041,46.369 v1(43.078,46.407)
  Bottom Layer w0.254: v1(35.154,46.406) v1(35.154,46.406) v1(43.078,46.407)
NetC10_2: C10.2 R9.1 U1.2 U1.29 | length 14.5
  Top Layer w0.254: C10.2 32.536,45.472 33.929,45.472 R9.1 33.992,45.535 34.918,45.535 v1(34.95,45.568) 35.508,45.01 U1.2 ; U1.29 43.054,45.01 v1(43.612,45.568)
  Bottom Layer w0.254: v1(34.95,45.568) v1(43.612,45.568)
NetC11_2: C11.2 R9.2 | length 1.6
  Top Layer w0.254: C11.2 32.624,46.953 R9.2
NetC12_2: C12.2 U1.32 | length 3.5
  Top Layer w0.254: U1.32 40.818,47.243 42.49,48.915 C12.2
NetR4_2: R4.2 R5.1 U1.28 | length 7.9
  Top Layer w0.254: U1.28 43.51,44.502 44.474,45.466 ; R4.2 44.474,45.466 ; R5.1 46.441,47.42 46.108,47.087 46.096,47.087 44.474,45.466
NetR6_1: R6.1 U1.37 | length 2.7
  Top Layer w0.254: U1.37 R6.1
NetR7_1: R7.1 U1.22 | length 4.7
  Top Layer w0.254: U1.22 44.229,41.454 45.744,39.939 R7.1
NetR8_1: R8.1 U1.9 | length 4.7
  Top Layer w0.254: R8.1 32.439,40.17 32.703,40.17 33.986,41.454 U1.9
SW1: C_BST1.1 L2.1 Q1.3 Q2.2 U1.21 | length 10.3
  Top Layer w0.254: U1.21 42.672,40.946 43.909,39.708 C_BST1.1 ; Q2.2 49.378,29.845 Q2.2@50.013,29.845
  Top Layer w0.5: C_BST1.1 47.787,35.713 Q1.3
SW2: C_BST2.1 L3.1 Q3.3 Q4.2 U1.10 | length 10.3
  Top Layer w0.254: C_BST2.1@34.129,39.566 C_BST2.1 34.145,39.581 35.509,40.946 U1.10
  Top Layer w0.5: Q3.3 30.277,35.713 33.027,38.464 C_BST2.1@34.129,39.566
Vb: C1.1 J1.1 L1.1
VCC: C_VCC1.2 C_VCC2.2 D1.2 D2.2 U1.15 U1.16
Vin: C2.1 C3.1 C13.1 C14.1 C15.1 C16.1 C17.1 C18.1 C19.1 C20.1 L1.2 Q1.2 Q3.2 U1.25 U1.31 U1.40 | length 27.6
  Top Layer w0.254: U1.40 v1@36.754,47.22 ; U1.31 41.326,46.507 v1(42.062,47.244) ; U1.25 43.408,42.978 v1(43.434,42.951)
  Bottom Layer w0.254: v1(36.779,47.245) 38.353,48.819 39.42,48.819 ; v1@39.42,57.148 39.42,48.819 ; v1(42.062,47.244) 40.488,48.819 39.42,48.819 ; v1(43.434,42.951) 43.434,41.427 46.608,38.253 Q1.2
  other v1: 39.421,57.149
pads on no net: MHNP1. MHNP2. MHNP3. MHNP4. U1.7 U1.24 U1.39

## Polygon pours and split planes (outlines as drawn)
GND on Top Layer "GND_L01_P012" (solid, pour order 12): 20.612,26.784 22.174,28.346 24.663,28.346 26.391,30.074 26.391,31.239 25.883,31.747 25.883,35.027 24.181,36.728 19.329,36.728 13.259,42.799 13.259,50.927 13.259,68.072 14.376,69.19 19.761,69.19 22.504,66.446 22.504,63.83 56.515,63.83 64.846,55.499 64.846,78.13 1.245,78.13 1.245,1.651 70.028,1.651 70.028,15.977 63.373,9.322 10.084,9.322 6.934,12.471 6.934,28.804 8.687,30.556 16.84,30.556
GND on Top Layer "GND_L01_P013" (solid, pour order 13): 55.824,27.407 52.593,27.407 51.003,28.997 51.003,30.226 52.375,31.598 52.375,35.103 54.153,36.881 58.369,36.881 64.846,43.358 64.846,78.13 73.457,78.13 73.457,1.651 70.028,1.651 70.028,29.642 69.215,30.455 60.833,30.455 56.804,26.426
GND on Top Layer "GND_L01_P011" (solid, pour order 11): 38.151,40.323 38.151,39.446 37.186,38.481 36.308,38.481 31.725,33.897 31.725,29.439 31.725,17.831 24.663,17.831 24.663,28.753 20.612,28.753 20.612,16.789 56.754,16.789 56.754,27.407 52.603,27.407 52.603,17.831 45.771,17.831 45.771,28.6 45.771,34.468 41.707,38.532 40.945,38.532 39.929,39.548 39.929,40.056 39.675,40.056 39.675,37.262 40.894,37.262 42.951,35.204 42.951,34.341 35.052,34.341 35.052,35.281 36.576,36.805 37.033,37.262 38.405,37.262 38.405,40.349
Vin on Top Layer "NONET_L04_P-001" (solid, pour order 1): 13.564,53.569 13.564,42.824 19.329,37.059 28.956,37.059 28.956,39.422 25.679,39.422 25.679,49.581 32.69,56.591 46.914,56.591 52.705,50.8 52.705,39.422 48.235,39.422 48.235,37.059 58.166,37.059 64.618,43.51 64.618,55.524 56.476,63.666 22.504,63.666 22.504,60.35 20.472,58.318 13.564,58.318
Vb on Top Layer "NONET_L04_P-001" (solid, pour order 20): 14.428,68.936 13.564,68.072 13.564,58.522 20.447,58.522 22.352,60.427 22.352,66.319 19.735,68.936
13V on Top Layer "Top Layer-13V" (solid, pour order 18): 69.825,16.053 69.825,29.413 68.999,30.239 60.973,30.239 57.988,27.254 57.988,25.324 59.004,24.308 62.509,24.308 62.789,24.028 62.789,18.44 60.985,16.637 16.281,16.637 14.63,18.288 14.63,23.952 15.164,24.486 18.313,24.486 19.355,25.527 19.355,27.661 16.739,30.277 8.839,30.277 7.112,28.55 7.112,12.548 10.135,9.525 63.297,9.525
GND on Top Layer "Top Layer-GND" (solid, pour order 16): 39.167,46.127 39.421,46.127 39.421,48.997 40.208,49.784 46.355,49.784 47.701,48.438 47.701,46.812 49.403,46.812 49.403,44.247 52.426,44.247 52.426,50.571 46.838,56.159 32.868,56.159 28.423,51.714 28.423,45.847 29.439,44.831 31.598,44.831 31.598,49.352 32.029,49.784 38.405,49.784 39.167,49.022
SW2 on Top Layer "SW2_L01_P007" (solid, pour order 7): 27.127,20.168 27.127,32.589 27.127,36.577 28.956,36.577 28.956,20.168
CS2 on Top Layer "CS2_L01_P006" (solid, pour order 6): 19.215,21.539 19.215,22.454 15.291,22.454 15.291,21.539
VCC on Top Layer "VCC_L01_P000" (solid, pour order 0): 38.659,40.539 38.913,40.539 38.913,39.599 39.167,39.599 39.167,40.031 39.421,40.031 39.421,36.972 40.929,36.972 42.778,35.124 42.778,34.544 35.254,34.544 35.254,35.178 36.855,36.779 37.049,36.972 38.659,36.972 38.659,40.031
CS1 on Top Layer "CS1_L01_P010" (solid, pour order 10): 62.205,22.301 62.205,21.361 58.291,21.361 58.291,22.301
SW1 on Top Layer "SW1_L01_P008" (solid, pour order 8): 50.216,20.074 50.216,36.601 48.235,36.601 48.235,20.074
GND on Bottom Layer "NONET_L04_P-001" (solid, pour order 23): 49.352,46.558 62.103,46.558 71.679,36.982 71.679,22.758 53.035,4.115 29.134,4.115 29.134,14.961 59.792,14.961 69.698,24.867 69.698,34.442 59.919,44.221 49.352,44.221
GND on Layer 2 (split plane): 74.49,0.51 0.51,0.51 0.51,79.49 74.49,79.49
GND on Layer 1 (split plane): 74.49,0.51 0.51,0.51 0.51,79.49 74.49,79.49

## Silkscreen, mask and mechanical layers (free items; w line width, h text height)
Top Overlay:
  drawing of 50 lines, arcs and shapes, not listed
  text "GND" at 17.572,79 h1.25 r180
  text "Vin" at 28.55,78.88 h1.52 r180
  text "+24V" at 23.525,78.852 h1.25 r180
  text "+13V5" at 33.498,0.751 h1.25
  text "Vout" at 27.661,0.712 h1.52
  text "GND" at 40.492,0.604 h1.25
Top Courtyard:
  the board outline again, w0.254